# Altium PCB bm78spp05nc2-multiple.PcbDoc
Units mm, origin at the board's own origin, x right, y up, seen from the top; angles counter-clockwise.
Board outline 83.62 x 87.38 mm, 2 copper layers (Top Layer, Bottom Layer); 102 components, 12 nets, 410 pads, 156 vias.
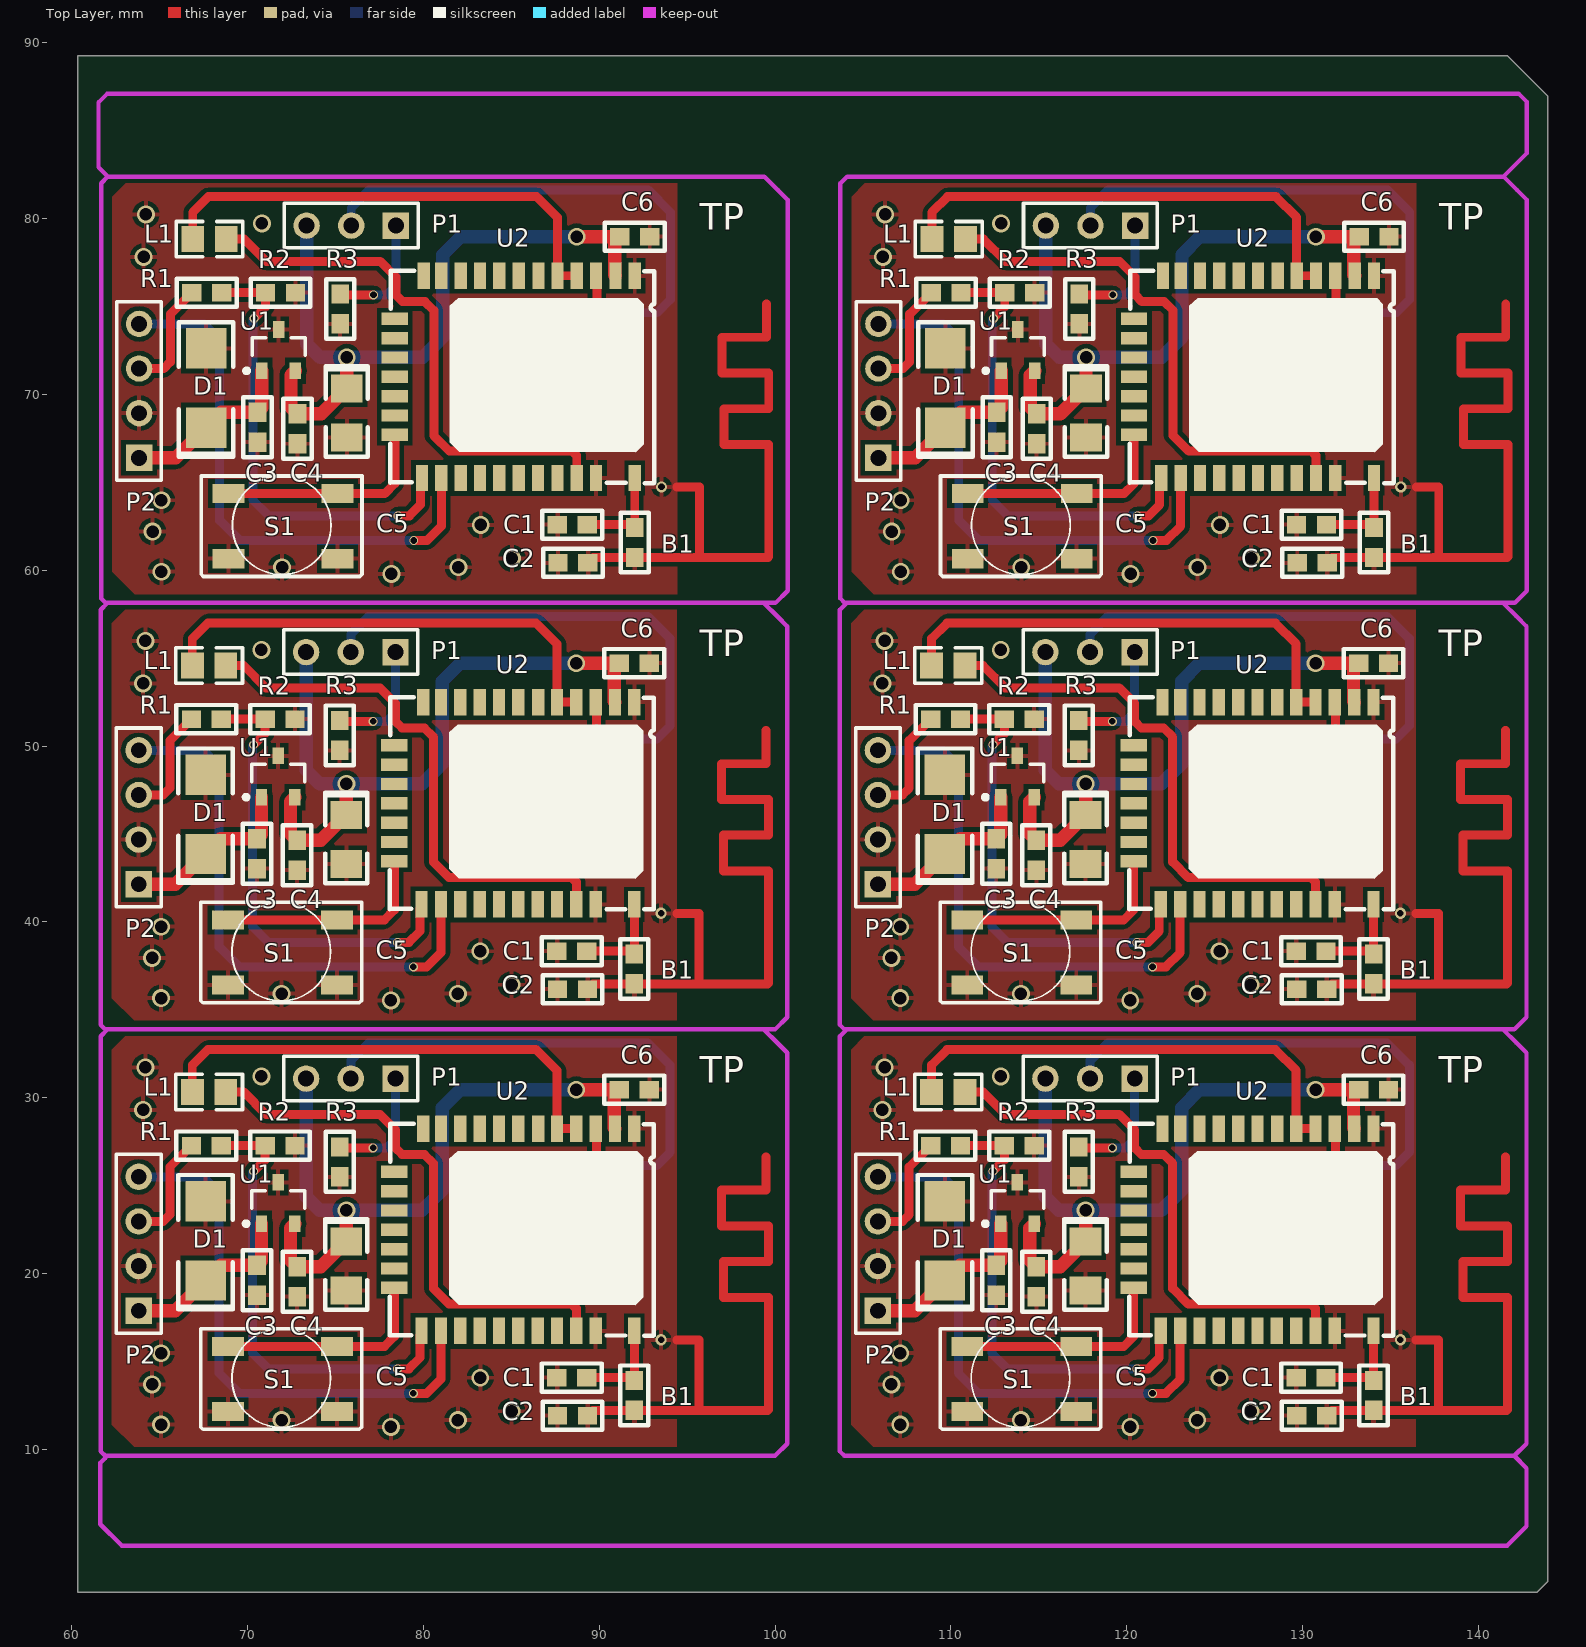
[diagram p0: Top Layer view]
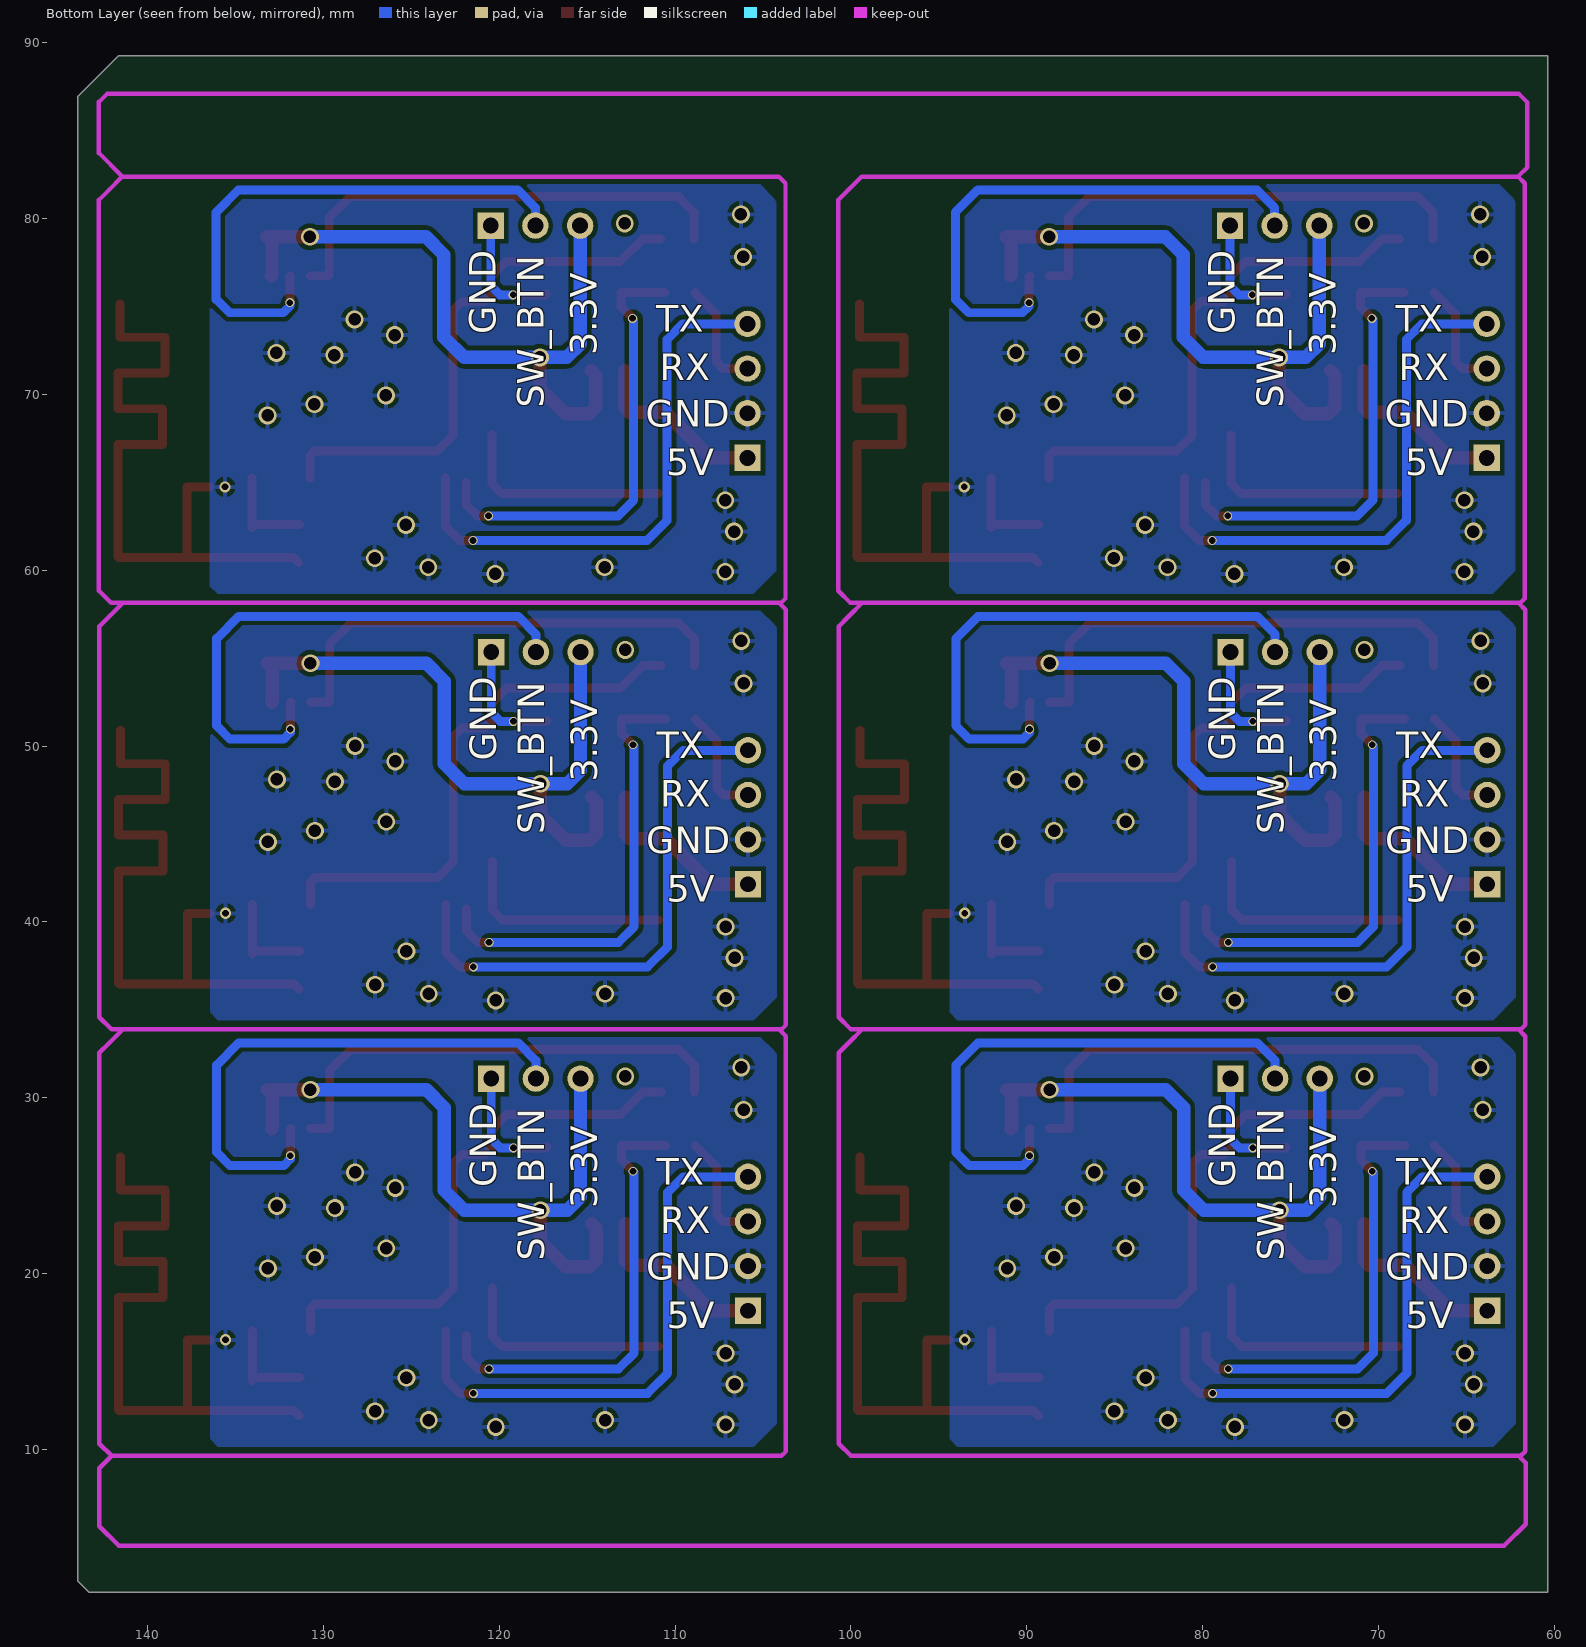
[diagram p1: Bottom Layer view, seen from below]

## Layer stack, top to bottom
Top Solder: solder mask 0.0102, Solder Resist, Dk 3.5
Top Layer: signal copper 0.0356
Dielectric 1: dielectric 0.32, FR-4, Dk 4.8
Bottom Layer: signal copper 0.0356
Bottom Solder: solder mask 0.0102, Solder Resist, Dk 3.5

## Board outline
60.35,1.88 143.358,1.88 143.967,2.489 143.967,86.97 141.681,89.256 60.35,89.256

## Design rules (kind name [scope] priority, off if disabled: settings)
Clearance [All] p1: gap=0.254
PolygonConnect [All] p1: connectstyle=Relief reliefconductorwidth=0.254 reliefentries=4 polygonreliefangle="90 Angle" airgapwidth=0.254
RoutingVias [All] p1: holewidth=0.381 width=0.508 viastyle="Through Hole" minholewidth=0.381 minwidth=0.508 maxholewidth=0.711 maxwidth=1.016
SolderMaskExpansion [All] p1: expansion=0.102
Width [All] p1: maxlimit=1.016 minlimit=0.254 preferedwidth=0.508
30 further rules are at their usual default settings.

## Components (designator, comment, footprint, x,y, rotation, side; value= is the part's Value field where it differs from the comment)
B1 "1nh" 0603 134.062,61.582 r270 top
B1 "1nh" 0603 92.012,61.582 r270 top
B1 "1nh" 0603 91.987,37.325 r270 top
B1 "1nh" 0603 134.037,37.325 r270 top
B1 "1nh" 0603 91.987,13.065 r270 top
B1 "1nh" 0603 134.037,13.065 r270 top
C1 "15pf" 0603 130.518,62.586 r0 top
C1 "15pf" 0603 88.468,62.586 r0 top
C1 "15pf" 0603 88.443,38.329 r0 top
C1 "15pf" 0603 130.493,38.329 r0 top
C1 "15pf" 0603 88.443,14.069 r0 top
C1 "15pf" 0603 130.493,14.069 r0 top
C2 "15pF" 0603 130.557,60.417 r0 top
C2 "15pF" 0603 88.507,60.417 r0 top
C2 "15pF" 0603 88.482,36.16 r0 top
C2 "15pF" 0603 130.532,36.16 r0 top
C2 "15pF" 0603 88.482,11.9 r0 top
C2 "15pF" 0603 130.532,11.9 r0 top
C3 "1uF" 0603 112.621,68.135 r90 top
C3 "1uF" 0603 70.571,68.135 r90 top
C3 "1uF" 0603 70.546,43.878 r90 top
C3 "1uF" 0603 112.596,43.878 r90 top
C3 "1uF" 0603 70.546,19.618 r90 top
C3 "1uF" 0603 112.596,19.618 r90 top
C4 "1uF" 0603 114.897,68.047 r90 top
C4 "1uF" 0603 72.847,68.047 r90 top
C4 "1uF" 0603 72.822,43.79 r90 top
C4 "1uF" 0603 114.872,43.79 r90 top
C4 "1uF" 0603 72.822,19.53 r90 top
C4 "1uF" 0603 114.872,19.53 r90 top
C5 "10uF/16V" 1206 117.691,68.936 r270 top
C5 "10uF/16V" 1206 75.641,68.936 r270 top
C5 "10uF/16V" 1206 75.616,44.679 r270 top
C5 "10uF/16V" 1206 117.666,44.679 r270 top
C5 "10uF/16V" 1206 75.616,20.419 r270 top
C5 "10uF/16V" 1206 117.666,20.419 r270 top
C6 "0.1uF" 0603 134.074,78.969 r0 top
C6 "0.1uF" 0603 92.024,78.969 r0 top
C6 "0.1uF" 0603 91.999,54.712 r0 top
C6 "0.1uF" 0603 134.049,54.712 r0 top
C6 "0.1uF" 0603 91.999,30.452 r0 top
C6 "0.1uF" 0603 134.049,30.452 r0 top
D1 "Schottky" DO214-AC 109.69,70.369 r270 top
D1 "Schottky" DO214-AC 67.64,70.369 r270 top
D1 "Schottky" DO214-AC 67.615,46.112 r270 top
D1 "Schottky" DO214-AC 109.665,46.112 r270 top
D1 "Schottky" DO214-AC 67.615,21.852 r270 top
D1 "Schottky" DO214-AC 109.665,21.852 r270 top
L1 "LED" 0805 109.883,78.842 r0 top
L1 "LED" 0805 67.833,78.842 r0 top
L1 "LED" 0805 67.808,54.585 r0 top
L1 "LED" 0805 109.858,54.585 r0 top
L1 "LED" 0805 67.808,30.325 r0 top
L1 "LED" 0805 109.858,30.325 r0 top
P1 "HC-SR501" Header3 117.945,77.334 r180 top
P1 "HC-SR501" Header3 75.895,77.334 r180 top
P1 "HC-SR501" Header3 75.87,53.077 r180 top
P1 "HC-SR501" Header3 117.92,53.077 r180 top
P1 "HC-SR501" Header3 75.87,28.817 r180 top
P1 "HC-SR501" Header3 117.92,28.817 r180 top
P2 "Header 4" HDR1X4 105.88,66.396 r90 top
P2 "Header 4" HDR1X4 63.83,66.396 r90 top
P2 "Header 4" HDR1X4 63.805,42.139 r90 top
P2 "Header 4" HDR1X4 105.855,42.139 r90 top
P2 "Header 4" HDR1X4 63.805,17.879 r90 top
P2 "Header 4" HDR1X4 105.855,17.879 r90 top
R1 "2.2K" 0603 109.729,75.784 r0 top
R1 "2.2K" 0603 67.679,75.784 r0 top
R1 "2.2K" 0603 67.654,51.527 r0 top
R1 "2.2K" 0603 109.704,51.527 r0 top
R1 "2.2K" 0603 67.654,27.267 r0 top
R1 "2.2K" 0603 109.704,27.267 r0 top
R2 "4.7K" 0603 113.92,75.804 r180 top
R2 "4.7K" 0603 71.87,75.804 r180 top
R2 "4.7K" 0603 71.845,51.547 r180 top
R2 "4.7K" 0603 113.895,51.547 r180 top
R2 "4.7K" 0603 71.845,27.287 r180 top
R2 "4.7K" 0603 113.895,27.287 r180 top
R3 "2.2K" 0603 117.32,74.866 r90 top
R3 "2.2K" 0603 75.27,74.866 r90 top
R3 "2.2K" 0603 75.245,50.609 r90 top
R3 "2.2K" 0603 117.295,50.609 r90 top
R3 "2.2K" 0603 75.245,26.349 r90 top
R3 "2.2K" 0603 117.295,26.349 r90 top
S1 "Button" BUtton-T4 117.16,60.664 r180 top
S1 "Button" BUtton-T4 75.11,60.664 r180 top
S1 "Button" BUtton-T4 75.085,36.407 r180 top
S1 "Button" BUtton-T4 117.135,36.407 r180 top
S1 "Button" BUtton-T4 75.085,12.147 r180 top
S1 "Button" BUtton-T4 117.135,12.147 r180 top
U1 "AP7313" AP7313-33SAG-7 113.815,72.524 r90 top
U1 "AP7313" AP7313-33SAG-7 71.765,72.524 r90 top
U1 "AP7313" AP7313-33SAG-7 71.74,48.267 r90 top
U1 "AP7313" AP7313-33SAG-7 113.79,48.267 r90 top
U1 "AP7313" AP7313-33SAG-7 71.74,24.007 r90 top
U1 "AP7313" AP7313-33SAG-7 113.79,24.007 r90 top
U2 "BM78SPP05NC2" BM78SPP05NC2 120.172,77.003 r270 top
U2 "BM78SPP05NC2" BM78SPP05NC2 78.122,77.003 r270 top
U2 "BM78SPP05NC2" BM78SPP05NC2 78.097,52.746 r270 top
U2 "BM78SPP05NC2" BM78SPP05NC2 120.147,52.746 r270 top
U2 "BM78SPP05NC2" BM78SPP05NC2 78.097,28.486 r270 top
U2 "BM78SPP05NC2" BM78SPP05NC2 120.147,28.486 r270 top

## Footprints (in the part's own frame and the unit in brackets; to place one, negate y for a bottom-side part, rotate by r counter-clockwise, add the part's x,y. Pads: shape width x height; smd on the part's side, far side on the other; paste and mask are expansions set on the pad)
0603 [mm]
  rect 1.1x1 smd: 1(-0.85,0.01) 2(0.85,0.01)
  silkscreen extent -1.7,-0.79 1.7,0.81
0805 [mm]
  rect 1.3x1.5 smd: 1(-0.95,0) 2(0.95,0)
  silkscreen extent -1.9,-1 1.9,1
1206 [mm]
  rect 1.6x1.8 smd: 1(-1.41,0) 2(1.39,0)
  silkscreen extent -2.68,-1.2 2.49,1.2
AP7313-33SAG-7 [mm] "SOT23, 3-Leads, Body 2.90x2.40mm, Pitch 0.95mm, IPC Medium Density"
  rect 0.95x0.65 smd: 1(-1.175,0.95) 2(-1.175,-0.95) 3(1.175,0)
  silkscreen extent -1.3,-1.5 0.7,1.95
BM78SPP05NC2 [mm]
  rect 1.5x0.7 smd: 1(0.25,13.9) 2(0.25,12.8) 3(0.25,11.7) 4(0.25,10.6) 5(0.25,9.5) 6(0.25,8.43) 7(0.25,7.3) 8(0.25,6.2) 9(0.25,5.1) 10(0.25,4) 11(0.25,2.9) 12(0.25,1.9) 20(11.75,1.8) 21(11.75,2.9) 22(11.75,4) 23(11.75,5.1) 24(11.75,6.2) 25(11.75,7.3) 26(11.75,8.4) 27(11.75,9.5) 28(11.75,10.6) 29(11.75,11.7) 30(11.75,13.9)
  rect 0.7x1.5 smd: 13(2.7,0.25) 14(3.8,0.25) 15(4.9,0.25) 16(6,0.25) 17(7.1,0.25) 18(8.2,0.25) 19(9.3,0.25)
  silkscreen extent -0.03,0 12.04,15.01
BUtton-T4 [mm] "4*4*1.5"
  rect 1.8x1.1 smd: 1(0,0) 1(6.2,0) 2(0,-3.7) 2(6.2,-3.7)
  silkscreen extent -1.4,-4.71 7.75,1.02
DO214-AC [mm]
  rect 2.3x2.3 smd: 1(-2.25,0) 2(2.25,0)
  silkscreen extent -3.75,-1.55 3.9,1.55
HDR1X4 [mm] "Connector; Header; 4 Position"
  rect 1.5x1.5 hole 0.9: 1(0,0)
  round 1.5 hole 0.9: 2(2.54,0) 3(5.08,0) 4(7.62,0)
  silkscreen extent -1.27,-1.27 8.89,1.27
Header3 [mm]
  rect 1.5x1.5 hole 0.9: 1(-2.54,-2.27)
  round 1.5 hole 0.9: 2(0,-2.27) 3(2.54,-2.27)
  silkscreen extent -3.81,-3.54 3.81,-1

## Part data
B1 B1 B1 B1 B1 B1: library part Bead
C1 C1 C1 C1 C1 C1 C2 C2 C2 C2 C2 C2 C3 C3 C3 C3 C3 C3 C4 C4 C4 C4 C4 C4 C6 C6 C6 C6 C6 C6: library part Cap1, "ceramic"
C5 C5 C5 C5 C5 C5: library part Cap3, "aluminum"
D1 D1 D1 D1 D1 D1: library part B340A-13-F
P1 P1 P1 P1 P1 P1: library part "Header 3", "Header, 3-Pin"
P2 P2 P2 P2 P2 P2: "Header, 4-Pin"
R1 R1 R1 R1 R1 R1 R2 R2 R2 R2 R2 R2 R3 R3 R3 R3 R3 R3: library part Res
U1 U1 U1 U1 U1 U1: library part AP7313-33SAG-7

## Free pads (board coordinates)
  round 1.524 on Keep-Out: 0(63.221,85.649) 1(140.945,6.121)

## Via types
v1: diameter 1.016, hole 0.711, Top Layer to Bottom Layer, 120 vias
v2: diameter 0.508, hole 0.381, Top Layer to Bottom Layer, 30 vias
v3: diameter 0.635, hole 0.381, Top Layer to Bottom Layer, 6 vias

## Nets (pads, with @x,y where several pads share a name; then routed paths per layer and width w, separated by ;. In a path a pad name is that pad's centre, name@x,y a point inside that pad or via, vN(x,y) a via of type N, cw(c..) or ccw(c..) an arc to the next point about the centre after c; other vN are vias at no path point)
3.3V: 
5V: 
ANT: 
LDO33_O: 
LED1: 
NetB1_1: 
NetP1_1: 
NetR1_2: 
NetS1_2: 
RX: 
SW_BTN: 
TX: 
pads on no net: B1.1 B1.2 C1.1 C1.2 C2.1 C2.2 C3.1 C3.2 C4.1 C4.2 C5.1 C5.2 C6.1 C6.2 D1.1 D1.2 L1.1 L1.2 P1.1 P1.2 P1.3 P2.1 P2.2 P2.3 P2.4 R1.1 R1.2 R2.1 R2.2 R3.1 R3.2 S1.1 S1.2 U1.1 U1.2 U1.3 U2.1 U2.2 U2.3 U2.4 U2.5 U2.6 U2.7 U2.8 U2.9 U2.10 U2.11 U2.12 U2.13 U2.14 U2.15 U2.16 U2.17 U2.18 U2.19 U2.20 U2.21 U2.22 U2.23 U2.24 U2.25 U2.26 U2.27 U2.28 U2.29 U2.30
copper on no net: | length 1620.9
  Top Layer w0.508: 63.805,22.959 65.202,22.959 65.583,23.34 65.583,26.056 66.804,27.277 ; 63.805,47.219 65.202,47.219 65.583,47.6 65.583,50.316 66.804,51.537 ; 63.83,71.476 65.227,71.476 65.608,71.857 65.608,74.573 66.829,75.794 ; 66.858,30.325 66.853,30.325 66.853,31.849 67.742,32.738 86.411,32.738 87.597,31.552 87.597,28.236 88.697,28.236 ; 66.858,54.585 66.853,54.585 66.853,56.109 67.742,56.998 86.411,56.998 87.597,55.812 87.597,52.496 88.697,52.496 ; 66.883,78.842 66.878,78.842 66.878,80.366 67.767,81.255 86.436,81.255 87.622,80.069 87.622,76.753 88.722,76.753 ; 68.504,27.277 70.995,27.277 70.995,26.466 v2(70.345,25.816) ; 68.504,51.537 70.995,51.537 70.995,50.726 v2(70.345,50.076) ; 68.529,75.794 71.02,75.794 71.02,74.983 v2(70.371,74.333) ; 68.758,30.325 69.774,30.325 71.044,29.055 77.521,29.055 78.41,28.166 78.41,27.15 78.791,26.769 80.061,26.769 80.569,26.261 80.569,19.149 81.458,18.26 88.443,18.26 88.697,18.006 88.697,16.736 ; 68.758,54.585 69.774,54.585 71.044,53.315 77.521,53.315 78.41,52.426 78.41,51.41 78.791,51.029 80.061,51.029 80.569,50.521 80.569,43.409 81.458,42.52 88.443,42.52 88.697,42.266 88.697,40.996 ; 68.783,78.842 69.799,78.842 71.069,77.572 77.546,77.572 78.435,76.683 78.435,75.667 78.816,75.286 80.086,75.286 80.594,74.778 80.594,67.666 81.483,66.777 88.468,66.777 88.722,66.523 88.722,65.253 ; 68.885,15.847 75.085,15.847 77.775,15.847 78.347,16.419 78.347,19.186 ; 68.885,40.107 75.085,40.107 77.775,40.107 78.347,40.679 78.347,43.446 ; 68.91,64.364 75.11,64.364 77.8,64.364 78.372,64.936 78.372,67.703 ; 75.235,27.199 75.284,27.15 v2(77.14,27.15) ; 75.235,51.459 75.284,51.41 v2(77.14,51.41) ; 75.26,75.716 75.309,75.667 v2(77.165,75.667) ; v2(78.537,14.577) 79.172,14.577 79.807,15.212 79.807,16.482 ; v2(78.537,38.837) 79.172,38.837 79.807,39.472 79.807,40.742 ; v2(78.562,63.094) 79.197,63.094 79.832,63.729 79.832,64.999 ; v2(79.426,13.18) 80.188,13.18 80.997,13.989 80.997,16.736 ; v2(79.426,37.44) 80.188,37.44 80.997,38.249 80.997,40.996 ; v2(79.451,61.697) 80.213,61.697 81.022,62.506 81.022,65.253 ; 89.293,14.079 91.833,14.079 91.997,13.915 91.997,16.736 ; 89.293,38.339 91.833,38.339 91.997,38.175 91.997,40.996 ; 89.318,62.596 91.858,62.596 92.022,62.432 92.022,65.253 ; 89.332,11.91 89.637,12.215 91.997,12.215 95.682,12.215 ; 89.332,36.17 89.637,36.475 91.997,36.475 95.682,36.475 ; 89.357,60.427 89.662,60.732 92.022,60.732 95.707,60.732 ; 89.797,28.236 89.84,28.193 v2(89.84,26.705) ; 89.797,52.496 89.84,52.453 v2(89.84,50.965) ; 89.822,76.753 89.865,76.71 v2(89.865,75.222) ; 94.412,16.228 95.682,16.228 95.682,12.215 ; 94.412,40.488 95.682,40.488 95.682,36.475 ; 94.437,64.745 95.707,64.745 95.707,60.732 ; 99.492,26.642 99.492,24.737 96.952,24.737 96.952,22.705 99.619,22.705 99.619,20.673 97.079,20.673 97.079,18.641 99.619,18.641 99.619,12.266 99.568,12.215 95.682,12.215 ; 99.492,50.902 99.492,48.997 96.952,48.997 96.952,46.965 99.619,46.965 99.619,44.933 97.079,44.933 97.079,42.901 99.619,42.901 99.619,36.526 99.568,36.475 95.682,36.475 ; 99.517,75.159 99.517,73.254 96.977,73.254 96.977,71.222 99.644,71.222 99.644,69.19 97.104,69.19 97.104,67.158 99.644,67.158 99.644,60.783 99.593,60.732 95.707,60.732 ; 105.855,22.959 107.252,22.959 107.633,23.34 107.633,26.056 108.854,27.277 ; 105.855,47.219 107.252,47.219 107.633,47.6 107.633,50.316 108.854,51.537 ; 105.88,71.476 107.277,71.476 107.658,71.857 107.658,74.573 108.879,75.794 ; 108.908,30.325 108.903,30.325 108.903,31.849 109.792,32.738 128.461,32.738 129.647,31.552 129.647,28.236 130.747,28.236 ; 108.908,54.585 108.903,54.585 108.903,56.109 109.792,56.998 128.461,56.998 129.647,55.812 129.647,52.496 130.747,52.496 ; 108.933,78.842 108.928,78.842 108.928,80.366 109.817,81.255 128.486,81.255 129.672,80.069 129.672,76.753 130.772,76.753 ; 110.554,27.277 113.045,27.277 113.045,26.466 v2(112.395,25.816) ; 110.554,51.537 113.045,51.537 113.045,50.726 v2(112.395,50.076) ; 110.579,75.794 113.07,75.794 113.07,74.983 v2(112.421,74.333) ; 110.808,30.325 111.824,30.325 113.094,29.055 119.571,29.055 120.46,28.166 120.46,27.15 120.841,26.769 122.111,26.769 122.619,26.261 122.619,19.149 123.508,18.26 130.493,18.26 130.747,18.006 130.747,16.736 ; 110.808,54.585 111.824,54.585 113.094,53.315 119.571,53.315 120.46,52.426 120.46,51.41 120.841,51.029 122.111,51.029 122.619,50.521 122.619,43.409 123.508,42.52 130.493,42.52 130.747,42.266 130.747,40.996 ; 110.833,78.842 111.849,78.842 113.119,77.572 119.596,77.572 120.485,76.683 120.485,75.667 120.866,75.286 122.136,75.286 122.644,74.778 122.644,67.666 123.533,66.777 130.518,66.777 130.772,66.523 130.772,65.253 ; 110.935,15.847 117.135,15.847 119.825,15.847 120.397,16.419 120.397,19.186 ; 110.935,40.107 117.135,40.107 119.825,40.107 120.397,40.679 120.397,43.446 ; 110.96,64.364 117.16,64.364 119.85,64.364 120.422,64.936 120.422,67.703 ; 117.285,27.199 117.334,27.15 v2(119.19,27.15) ; 117.285,51.459 117.334,51.41 v2(119.19,51.41) ; 117.31,75.716 117.359,75.667 v2(119.215,75.667) ; v2(120.587,14.577) 121.222,14.577 121.857,15.212 121.857,16.482 ; v2(120.587,38.837) 121.222,38.837 121.857,39.472 121.857,40.742 ; v2(120.612,63.094) 121.247,63.094 121.882,63.729 121.882,64.999 ; v2(121.476,13.18) 122.238,13.18 123.047,13.989 123.047,16.736 ; v2(121.476,37.44) 122.238,37.44 123.047,38.249 123.047,40.996 ; v2(121.501,61.697) 122.263,61.697 123.072,62.506 123.072,65.253 ; 131.343,14.079 133.883,14.079 134.047,13.915 134.047,16.736 ; 131.343,38.339 133.883,38.339 134.047,38.175 134.047,40.996 ; 131.368,62.596 133.908,62.596 134.072,62.432 134.072,65.253 ; 131.382,11.91 131.687,12.215 134.047,12.215 137.732,12.215 ; 131.382,36.17 131.687,36.475 134.047,36.475 137.732,36.475 ; 131.407,60.427 131.712,60.732 134.072,60.732 137.757,60.732 ; 131.847,28.236 131.89,28.193 v2(131.89,26.705) ; 131.847,52.496 131.89,52.453 v2(131.89,50.965) ; 131.872,76.753 131.915,76.71 v2(131.915,75.222) ; 136.462,16.228 137.732,16.228 137.732,12.215 ; 136.462,40.488 137.732,40.488 137.732,36.475 ; 136.487,64.745 137.757,64.745 137.757,60.732 ; 141.542,26.642 141.542,24.737 139.002,24.737 139.002,22.705 141.669,22.705 141.669,20.673 139.129,20.673 139.129,18.641 141.669,18.641 141.669,12.266 141.618,12.215 137.732,12.215 ; 141.542,50.902 141.542,48.997 139.002,48.997 139.002,46.965 141.669,46.965 141.669,44.933 139.129,44.933 139.129,42.901 141.669,42.901 141.669,36.526 141.618,36.475 137.732,36.475 ; 141.567,75.159 141.567,73.254 139.027,73.254 139.027,71.222 141.694,71.222 141.694,69.19 139.154,69.19 139.154,67.158 141.694,67.158 141.694,60.783 141.643,60.732 137.757,60.732
  Top Layer w0.762: 63.805,17.879 65.892,17.879 67.615,19.602 68.481,20.468 70.536,20.468 70.79,20.722 70.79,22.832 ; 63.805,42.139 65.892,42.139 67.615,43.862 68.481,44.728 70.536,44.728 70.79,44.982 70.79,47.092 ; 63.83,66.396 65.917,66.396 67.64,68.119 68.506,68.985 70.561,68.985 70.815,69.239 70.815,71.349 ; 72.69,22.832 72.441,22.583 72.441,20.751 72.812,20.38 74.167,20.38 75.616,21.829 v1(75.616,23.594) ; 72.69,47.092 72.441,46.843 72.441,45.011 72.812,44.64 74.167,44.64 75.616,46.089 v1(75.616,47.854) ; 72.715,71.349 72.466,71.1 72.466,69.268 72.837,68.897 74.192,68.897 75.641,70.346 v1(75.641,72.111) ; v1(88.697,30.452) 91.139,30.452 ; v1(88.697,54.712) 91.139,54.712 ; v1(88.722,78.969) 91.164,78.969 ; 90.897,28.236 90.856,28.277 90.856,30.169 91.139,30.452 ; 90.897,52.496 90.856,52.537 90.856,54.429 91.139,54.712 ; 90.922,76.753 90.881,76.794 90.881,78.686 91.164,78.969 ; 91.149,30.462 91.139,30.452 ; 91.149,54.722 91.139,54.712 ; 91.174,78.979 91.164,78.969 ; 105.855,17.879 107.942,17.879 109.665,19.602 110.531,20.468 112.586,20.468 112.84,20.722 112.84,22.832 ; 105.855,42.139 107.942,42.139 109.665,43.862 110.531,44.728 112.586,44.728 112.84,44.982 112.84,47.092 ; 105.88,66.396 107.967,66.396 109.69,68.119 110.556,68.985 112.611,68.985 112.865,69.239 112.865,71.349 ; 114.74,22.832 114.491,22.583 114.491,20.751 114.862,20.38 116.217,20.38 117.666,21.829 v1(117.666,23.594) ; 114.74,47.092 114.491,46.843 114.491,45.011 114.862,44.64 116.217,44.64 117.666,46.089 v1(117.666,47.854) ; 114.765,71.349 114.516,71.1 114.516,69.268 114.887,68.897 116.242,68.897 117.691,70.346 v1(117.691,72.111) ; v1(130.747,30.452) 133.189,30.452 ; v1(130.747,54.712) 133.189,54.712 ; v1(130.772,78.969) 133.214,78.969 ; 132.947,28.236 132.906,28.277 132.906,30.169 133.189,30.452 ; 132.947,52.496 132.906,52.537 132.906,54.429 133.189,54.712 ; 132.972,76.753 132.931,76.794 132.931,78.686 133.214,78.969 ; 133.199,30.462 133.189,30.452 ; 133.199,54.722 133.189,54.712 ; 133.224,78.979 133.214,78.969
  Bottom Layer w0.508: 63.805,25.499 67.488,25.499 68.377,24.61 68.377,14.323 69.52,13.18 v2(79.426,13.18) ; 63.805,49.759 67.488,49.759 68.377,48.87 68.377,38.583 69.52,37.44 v2(79.426,37.44) ; 63.83,74.016 67.513,74.016 68.402,73.127 68.402,62.84 69.545,61.697 v2(79.451,61.697) ; v2(70.345,25.816) 70.282,25.753 70.282,15.466 71.171,14.577 v2(78.537,14.577) ; v2(70.345,50.076) 70.282,50.013 70.282,39.726 71.171,38.837 v2(78.537,38.837) ; v2(70.371,74.333) 70.307,74.27 70.307,63.983 71.196,63.094 v2(78.562,63.094) ; 75.87,31.087 75.87,32.103 76.886,33.119 92.761,33.119 94.031,31.849 94.031,26.896 93.269,26.134 90.221,26.134 89.84,26.515 v2(89.84,26.705) ; 75.87,55.347 75.87,56.363 76.886,57.379 92.761,57.379 94.031,56.109 94.031,51.156 93.269,50.394 90.221,50.394 89.84,50.775 v2(89.84,50.965) ; 75.895,79.604 75.895,80.62 76.911,81.636 92.786,81.636 94.056,80.366 94.056,75.413 93.294,74.651 90.246,74.651 89.865,75.032 v2(89.865,75.222) ; v2(77.14,27.15) 77.902,27.15 78.41,27.658 78.41,31.087 ; v2(77.14,51.41) 77.902,51.41 78.41,51.918 78.41,55.347 ; v2(77.165,75.667) 77.927,75.667 78.435,76.175 78.435,79.604 ; 105.855,25.499 109.538,25.499 110.427,24.61 110.427,14.323 111.57,13.18 v2(121.476,13.18) ; 105.855,49.759 109.538,49.759 110.427,48.87 110.427,38.583 111.57,37.44 v2(121.476,37.44) ; 105.88,74.016 109.563,74.016 110.452,73.127 110.452,62.84 111.595,61.697 v2(121.501,61.697) ; v2(112.395,25.816) 112.332,25.753 112.332,15.466 113.221,14.577 v2(120.587,14.577) ; v2(112.395,50.076) 112.332,50.013 112.332,39.726 113.221,38.837 v2(120.587,38.837) ; v2(112.421,74.333) 112.357,74.27 112.357,63.983 113.246,63.094 v2(120.612,63.094) ; 117.92,31.087 117.92,32.103 118.936,33.119 134.811,33.119 136.081,31.849 136.081,26.896 135.319,26.134 132.271,26.134 131.89,26.515 v2(131.89,26.705) ; 117.92,55.347 117.92,56.363 118.936,57.379 134.811,57.379 136.081,56.109 136.081,51.156 135.319,50.394 132.271,50.394 131.89,50.775 v2(131.89,50.965) ; 117.945,79.604 117.945,80.62 118.961,81.636 134.836,81.636 136.106,80.366 136.106,75.413 135.344,74.651 132.296,74.651 131.915,75.032 v2(131.915,75.222) ; v2(119.19,27.15) 119.952,27.15 120.46,27.658 120.46,31.087 ; v2(119.19,51.41) 119.952,51.41 120.46,51.918 120.46,55.347 ; v2(119.215,75.667) 119.977,75.667 120.485,76.175 120.485,79.604
  Bottom Layer w0.762: 73.33,31.087 73.33,24.356 74.092,23.594 v1(75.616,23.594) 79.934,23.594 81.077,24.737 81.077,29.436 82.093,30.452 v1(88.697,30.452) ; 73.33,55.347 73.33,48.616 74.092,47.854 v1(75.616,47.854) 79.934,47.854 81.077,48.997 81.077,53.696 82.093,54.712 v1(88.697,54.712) ; 73.355,79.604 73.355,72.873 74.117,72.111 v1(75.641,72.111) 79.959,72.111 81.102,73.254 81.102,77.953 82.118,78.969 v1(88.722,78.969) ; 115.38,31.087 115.38,24.356 116.142,23.594 v1(117.666,23.594) 121.984,23.594 123.127,24.737 123.127,29.436 124.143,30.452 v1(130.747,30.452) ; 115.38,55.347 115.38,48.616 116.142,47.854 v1(117.666,47.854) 121.984,47.854 123.127,48.997 123.127,53.696 124.143,54.712 v1(130.747,54.712) ; 115.405,79.604 115.405,72.873 116.167,72.111 v1(117.691,72.111) 122.009,72.111 123.152,73.254 123.152,77.953 124.168,78.969 v1(130.772,78.969)
  other v1: 78.156,11.275 120.206,11.275 65.075,11.402 107.125,11.402 71.933,11.656 81.966,11.656 113.983,11.656 124.016,11.656 85.014,12.164 127.064,12.164 64.567,13.688 106.617,13.688 83.236,14.069 125.286,14.069 65.075,15.466 107.125,15.466 91.11,20.292 133.16,20.292 88.443,20.927 130.493,20.927 84.379,21.435 126.429,21.435 87.3,23.721 129.35,23.721 90.602,23.848 132.652,23.848 83.871,24.864 125.921,24.864 86.157,25.753 128.207,25.753 64.059,29.309 106.109,29.309 70.79,31.214 112.84,31.214 64.186,31.722 106.236,31.722 78.156,35.535 120.206,35.535 65.075,35.662 107.125,35.662 71.933,35.916 81.966,35.916 113.983,35.916 124.016,35.916 85.014,36.424 127.064,36.424 64.567,37.948 106.617,37.948 83.236,38.329 125.286,38.329 65.075,39.726 107.125,39.726 91.11,44.552 133.16,44.552 88.443,45.187 130.493,45.187 84.379,45.695 126.429,45.695 87.3,47.981 129.35,47.981 90.602,48.108 132.652,48.108 83.871,49.124 125.921,49.124 86.157,50.013 128.207,50.013 64.059,53.569 106.109,53.569 70.79,55.474 112.84,55.474 64.186,55.982 106.236,55.982 78.181,59.792 120.231,59.792 65.1,59.919 107.15,59.919 71.958,60.173 81.991,60.173 114.008,60.173 124.041,60.173 85.039,60.681 127.089,60.681 64.592,62.205 106.642,62.205 83.261,62.586 125.311,62.586 65.1,63.983 107.15,63.983 91.135,68.809 133.185,68.809 88.468,69.444 130.518,69.444 84.404,69.952 126.454,69.952 87.325,72.238 129.375,72.238 90.627,72.365 132.677,72.365 83.896,73.381 125.946,73.381 86.182,74.27 128.232,74.27 64.084,77.826 106.134,77.826 70.815,79.731 112.865,79.731 64.211,80.239 106.261,80.239
  other v3: 93.523,16.228 135.573,16.228 93.523,40.488 135.573,40.488 93.548,64.745 135.598,64.745

## Polygon pours and split planes (outlines as drawn)
no net on Top Layer "GND" (solid, remove dead copper, pour order 28): 104.356,81.255 105.118,82.017 136.487,82.017 136.487,79.35 136.487,77.064 136.487,59.665 136.487,59.157 136.487,58.649 105.88,58.649 105.626,58.649 104.356,59.919 104.356,68.555
no net on Top Layer "GND" (solid, remove dead copper, pour order 24): 62.306,81.255 63.068,82.017 94.437,82.017 94.437,79.35 94.437,77.064 94.437,59.665 94.437,59.157 94.437,58.649 63.83,58.649 63.576,58.649 62.306,59.919 62.306,68.555
no net on Top Layer "GND" (solid, remove dead copper, pour order 32): 62.281,56.998 63.043,57.76 94.412,57.76 94.412,55.093 94.412,52.807 94.412,35.408 94.412,34.9 94.412,34.392 63.805,34.392 63.551,34.392 62.281,35.662 62.281,44.298
no net on Top Layer "GND" (solid, remove dead copper, pour order 34): 104.331,56.998 105.093,57.76 136.462,57.76 136.462,55.093 136.462,52.807 136.462,35.408 136.462,34.9 136.462,34.392 105.855,34.392 105.601,34.392 104.331,35.662 104.331,44.298
no net on Top Layer "GND" (solid, remove dead copper, pour order 40): 62.281,32.738 63.043,33.5 94.412,33.5 94.412,30.833 94.412,28.547 94.412,11.148 94.412,10.64 94.412,10.132 63.805,10.132 63.551,10.132 62.281,11.402 62.281,20.038
no net on Top Layer "GND" (solid, remove dead copper, pour order 42): 104.331,32.738 105.093,33.5 136.462,33.5 136.462,30.833 136.462,28.547 136.462,11.148 136.462,10.64 136.462,10.132 105.855,10.132 105.601,10.132 104.331,11.402 104.331,20.038
no net on Bottom Layer "GND" (solid, remove dead copper, pour order 30): 104.407,81.204 105.169,81.966 136.259,81.966 136.462,81.763 136.462,59.182 136.462,59.106 136.03,58.674 105.55,58.674 104.305,59.919 104.255,59.969 104.255,80.645 104.255,80.975
no net on Bottom Layer "GND" (solid, remove dead copper, pour order 26): 62.357,81.204 63.119,81.966 94.209,81.966 94.412,81.763 94.412,59.182 94.412,59.106 93.98,58.674 63.5,58.674 62.255,59.919 62.205,59.969 62.205,80.645 62.205,80.975
no net on Bottom Layer "GND" (solid, remove dead copper, pour order 36): 62.332,56.947 63.094,57.709 94.183,57.709 94.386,57.506 94.386,34.925 94.386,34.849 93.955,34.417 63.475,34.417 62.23,35.662 62.179,35.712 62.179,56.388 62.179,56.718
no net on Bottom Layer "GND" (solid, remove dead copper, pour order 38): 104.382,56.947 105.144,57.709 136.233,57.709 136.436,57.506 136.436,34.925 136.436,34.849 136.005,34.417 105.525,34.417 104.28,35.662 104.229,35.712 104.229,56.388 104.229,56.718
no net on Bottom Layer "GND" (solid, remove dead copper, pour order 44): 62.332,32.687 63.094,33.449 94.183,33.449 94.386,33.246 94.386,10.665 94.386,10.589 93.955,10.157 63.475,10.157 62.23,11.402 62.179,11.452 62.179,32.128 62.179,32.458
no net on Bottom Layer "GND" (solid, remove dead copper, pour order 46): 104.382,32.687 105.144,33.449 136.233,33.449 136.436,33.246 136.436,10.665 136.436,10.589 136.005,10.157 105.525,10.157 104.28,11.402 104.229,11.452 104.229,32.128 104.229,32.458

## Keep-outs
Keep-Out Layer:
  lines w0.254: 142.078,9.595 142.748,8.925 142.748,5.614 141.656,4.521 141.25,4.521 137.871,4.521 62.84,4.521 61.62,5.74 61.62,9.22 61.9,9.5 61.9,9.624 ; 61.9,9.624 100,9.624 100.698,10.322 100.698,24.8 100.698,32.547 100.127,33.119 99.365,33.881 62.027,33.881 61.646,33.5 61.646,27.753 61.646,15.751 61.646,9.878 61.9,9.624 ; 62.052,82.398 61.671,82.017 61.671,76.27 61.671,64.268 61.671,58.395 61.925,58.141 100.025,58.141 100.724,58.839 100.724,73.317 100.724,81.064 100.152,81.636 99.39,82.398 62.052,82.398 ; 62.052,82.398 61.519,82.931 61.519,86.614 62.001,87.097 99.873,87.097 136.741,87.097 142.316,87.097 142.774,86.639 142.774,83.731 141.44,82.398 ; 141.44,82.398 104.102,82.398 103.721,82.017 103.721,76.27 103.721,64.268 103.721,58.395 103.975,58.141 142.075,58.141 142.774,58.839 142.774,73.317 142.774,81.064 142.202,81.636 141.44,82.398 ; 61.646,34.138 61.9,33.884 100,33.884 100.698,34.582 100.698,49.06 100.698,56.807 100.127,57.379 99.365,58.141 62.027,58.141 61.646,57.76 61.646,52.013 61.646,40.011 61.646,34.138 ; 103.696,9.878 103.95,9.624 142.05,9.624 142.748,10.322 142.748,24.8 142.748,32.547 142.177,33.119 141.415,33.881 104.077,33.881 103.696,33.5 103.696,27.753 103.696,15.751 103.696,9.878 ; 103.696,34.138 103.95,33.884 142.05,33.884 142.748,34.582 142.748,49.06 142.748,56.807 142.177,57.379 141.415,58.141 104.077,58.141 103.696,57.76 103.696,52.013 103.696,40.011 103.696,34.138

## Silkscreen, mask and mechanical layers (free items; w line width, h text height)
Top Overlay:
  region: 123.559,75.057 124.041,75.463 124.117,75.463 134.252,75.463 134.582,75.133 134.582,67.158 134.125,66.7 134.074,66.751 124.092,66.751 123.559,67.285
  region: 81.509,75.057 81.991,75.463 82.067,75.463 92.202,75.463 92.532,75.133 92.532,67.158 92.075,66.7 92.024,66.751 82.042,66.751 81.509,67.285
  region: 81.483,50.8 81.966,51.206 82.042,51.206 92.177,51.206 92.507,50.876 92.507,42.901 92.05,42.443 91.999,42.494 82.017,42.494 81.483,43.028
  region: 123.533,50.8 124.016,51.206 124.092,51.206 134.227,51.206 134.557,50.876 134.557,42.901 134.1,42.443 134.049,42.494 124.067,42.494 123.533,43.028
  region: 81.483,26.54 81.966,26.946 82.042,26.946 92.177,26.946 92.507,26.616 92.507,18.641 92.05,18.183 91.999,18.234 82.017,18.234 81.483,18.768
  region: 123.533,26.54 124.016,26.946 124.092,26.946 134.227,26.946 134.557,26.616 134.557,18.641 134.1,18.183 134.049,18.234 124.067,18.234 123.533,18.768
  text "TP" at 95.733,79.375 h1.52
  text "TP" at 137.783,79.375 h1.52
  text "TP" at 95.707,55.118 h1.52
  text "TP" at 137.757,55.118 h1.52
  text "TP" at 95.707,30.858 h1.52
  text "TP" at 137.757,30.858 h1.52
Bottom Overlay:
  text "TX" at 69.012,73.558 h1.52
  text "TX" at 111.062,73.558 h1.52
  text "GND" at 78.156,73.431 h1.52 r270
  text "GND" at 120.206,73.431 h1.52 r270
  text "3.3V" at 72.415,72.238 h1.52 r270
  text "3.3V" at 114.465,72.238 h1.52 r270
  text "RX" at 68.834,70.815 h1.52
  text "RX" at 110.884,70.815 h1.52
  text "SW_BTN" at 75.413,69.24 h1.52 r270
  text "SW_BTN" at 117.463,69.24 h1.52 r270
  text "GND" at 69.621,68.174 h1.52
  text "GND" at 111.671,68.174 h1.52
  text "5V" at 68.453,65.405 h1.52
  text "5V" at 110.503,65.405 h1.52
  text "TX" at 68.986,49.301 h1.52
  text "TX" at 111.036,49.301 h1.52
  text "GND" at 78.13,49.174 h1.52 r270
  text "GND" at 120.18,49.174 h1.52 r270
  text "3.3V" at 72.39,47.981 h1.52 r270
  text "3.3V" at 114.44,47.981 h1.52 r270
  text "RX" at 68.809,46.558 h1.52
  text "RX" at 110.859,46.558 h1.52
  text "SW_BTN" at 75.387,44.983 h1.52 r270
  text "SW_BTN" at 117.437,44.983 h1.52 r270
  text "GND" at 69.596,43.917 h1.52
  text "GND" at 111.646,43.917 h1.52
  text "5V" at 68.428,41.148 h1.52
  text "5V" at 110.478,41.148 h1.52
  text "TX" at 68.986,25.041 h1.52
  text "TX" at 111.036,25.041 h1.52
  text "GND" at 78.13,24.914 h1.52 r270
  text "GND" at 120.18,24.914 h1.52 r270
  text "3.3V" at 72.39,23.721 h1.52 r270
  text "3.3V" at 114.44,23.721 h1.52 r270
  text "RX" at 68.809,22.298 h1.52
  text "RX" at 110.859,22.298 h1.52
  text "SW_BTN" at 75.387,20.723 h1.52 r270
  text "SW_BTN" at 117.437,20.723 h1.52 r270
  text "GND" at 69.596,19.657 h1.52
  text "GND" at 111.646,19.657 h1.52
  text "5V" at 68.428,16.888 h1.52
  text "5V" at 110.478,16.888 h1.52
Top Paste:
  lines w0.5: 92.1,12.214 96.088,12.214 99.517,12.214 99.619,12.316 99.619,18.666 99.593,18.641 97.079,18.641 97.079,20.673 99.619,20.673 99.619,22.705 96.977,22.705 96.952,22.73 96.952,24.737 99.492,24.737 99.492,26.642 ; 92.1,36.474 96.088,36.474 99.517,36.474 99.619,36.576 99.619,42.926 99.593,42.901 97.079,42.901 97.079,44.933 99.619,44.933 99.619,46.965 96.977,46.965 96.952,46.99 96.952,48.997 99.492,48.997 99.492,50.902 ; 92.126,60.731 96.114,60.731 99.543,60.731 99.644,60.833 99.644,67.183 99.619,67.158 97.104,67.158 97.104,69.19 99.644,69.19 99.644,71.222 97.003,71.222 96.977,71.247 96.977,73.254 99.517,73.254 99.517,75.159 ; 134.15,12.214 138.138,12.214 141.567,12.214 141.669,12.316 141.669,18.666 141.643,18.641 139.129,18.641 139.129,20.673 141.669,20.673 141.669,22.705 139.027,22.705 139.002,22.73 139.002,24.737 141.542,24.737 141.542,26.642 ; 134.15,36.474 138.138,36.474 141.567,36.474 141.669,36.576 141.669,42.926 141.643,42.901 139.129,42.901 139.129,44.933 141.669,44.933 141.669,46.965 139.027,46.965 139.002,46.99 139.002,48.997 141.542,48.997 141.542,50.902 ; 134.176,60.731 138.164,60.731 141.593,60.731 141.694,60.833 141.694,67.183 141.669,67.158 139.154,67.158 139.154,69.19 141.694,69.19 141.694,71.222 139.053,71.222 139.027,71.247 139.027,73.254 141.567,73.254 141.567,75.159
  lines w0.6: 94.691,16.253 95.656,16.253 95.682,16.228 95.682,12.214 ; 94.691,40.513 95.656,40.513 95.682,40.488 95.682,36.474 ; 94.717,64.77 95.682,64.77 95.707,64.745 95.707,60.731 ; 136.741,16.253 137.706,16.253 137.732,16.228 137.732,12.214 ; 136.741,40.513 137.706,40.513 137.732,40.488 137.732,36.474 ; 136.767,64.77 137.732,64.77 137.757,64.745 137.757,60.731
Top Solder:
  lines w0.6: 91.999,12.24 99.593,12.24 99.619,12.265 99.619,18.666 99.593,18.641 97.104,18.641 97.079,18.666 97.079,20.698 99.644,20.698 99.619,20.723 99.619,22.705 99.568,22.755 96.926,22.755 96.952,22.781 96.952,24.737 99.543,24.737 99.492,24.787 99.492,26.616 ; 91.999,36.5 99.593,36.5 99.619,36.525 99.619,42.926 99.593,42.901 97.104,42.901 97.079,42.926 97.079,44.958 99.644,44.958 99.619,44.983 99.619,46.965 99.568,47.015 96.926,47.015 96.952,47.041 96.952,48.997 99.543,48.997 99.492,49.047 99.492,50.876 ; 92.024,60.757 99.619,60.757 99.644,60.782 99.644,67.183 99.619,67.158 97.13,67.158 97.104,67.183 97.104,69.215 99.67,69.215 99.644,69.24 99.644,71.222 99.593,71.272 96.952,71.272 96.977,71.298 96.977,73.254 99.568,73.254 99.517,73.304 99.517,75.133 ; 94.666,16.253 95.656,16.253 95.682,16.228 95.682,12.468 ; 94.666,40.513 95.656,40.513 95.682,40.488 95.682,36.728 ; 94.691,64.77 95.682,64.77 95.707,64.745 95.707,60.985 ; 134.049,12.24 141.643,12.24 141.669,12.265 141.669,18.666 141.643,18.641 139.154,18.641 139.129,18.666 139.129,20.698 141.694,20.698 141.669,20.723 141.669,22.705 141.618,22.755 138.976,22.755 139.002,22.781 139.002,24.737 141.593,24.737 141.542,24.787 141.542,26.616 ; 134.049,36.5 141.643,36.5 141.669,36.525 141.669,42.926 141.643,42.901 139.154,42.901 139.129,42.926 139.129,44.958 141.694,44.958 141.669,44.983 141.669,46.965 141.618,47.015 138.976,47.015 139.002,47.041 139.002,48.997 141.593,48.997 141.542,49.047 141.542,50.876 ; 134.074,60.757 141.669,60.757 141.694,60.782 141.694,67.183 141.669,67.158 139.18,67.158 139.154,67.183 139.154,69.215 141.72,69.215 141.694,69.24 141.694,71.222 141.643,71.272 139.002,71.272 139.027,71.298 139.027,73.254 141.618,73.254 141.567,73.304 141.567,75.133 ; 136.716,16.253 137.706,16.253 137.732,16.228 137.732,12.468 ; 136.716,40.513 137.706,40.513 137.732,40.488 137.732,36.728 ; 136.741,64.77 137.732,64.77 137.757,64.745 137.757,60.985